# Altium PCB Copy of 软排转接.PcbDoc
Units mm, origin at the board's own origin, x right, y up, seen from the top; angles counter-clockwise.
Board outline 32 x 73.79 mm, 2 copper layers (Top Layer, Bottom Layer); 11 components, 73 nets, 188 pads, 1 vias.
Unrouted connection lines stored in the file: 57.
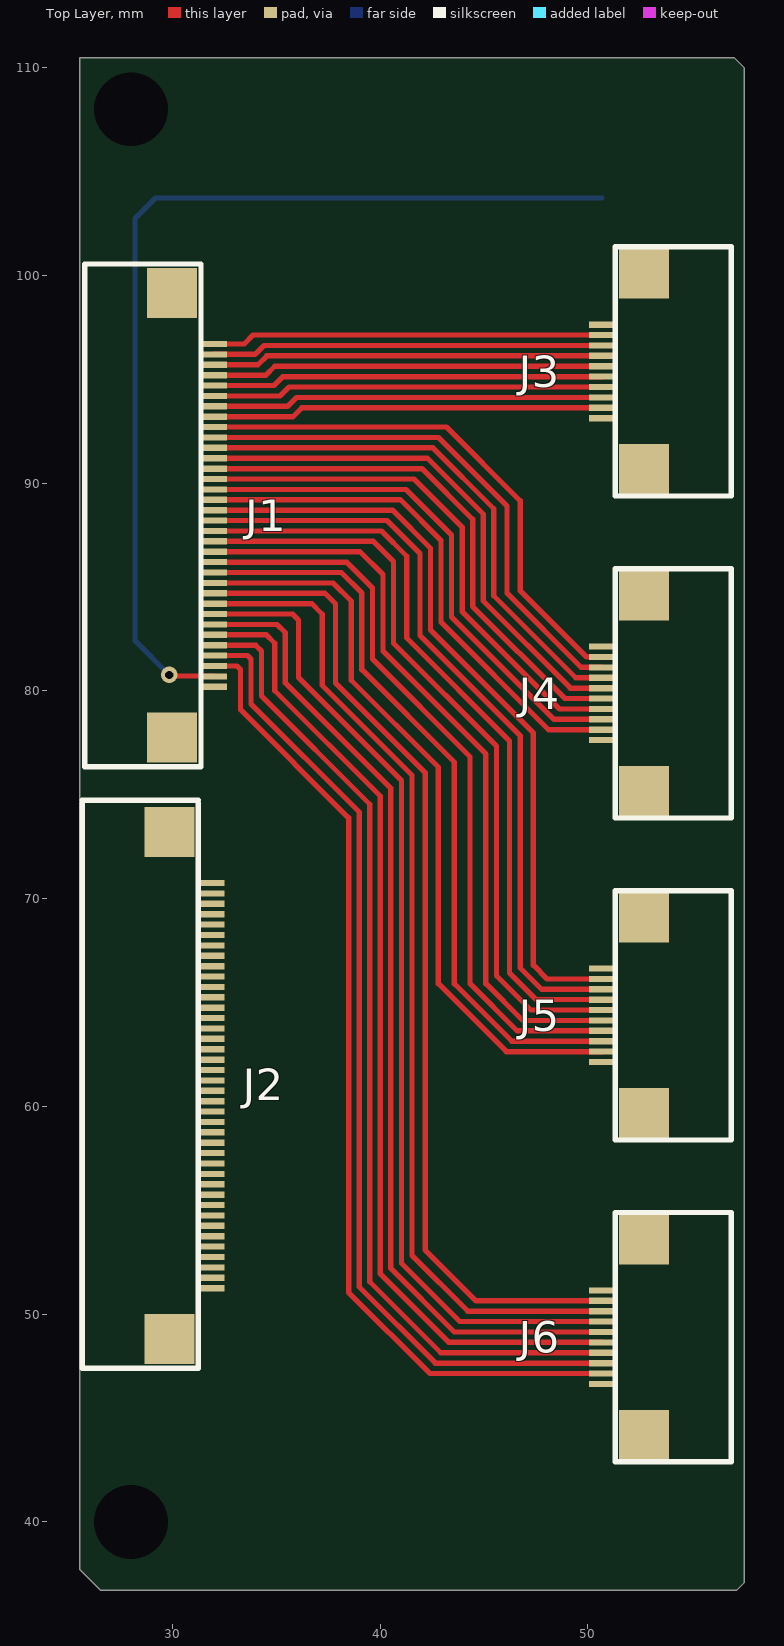
[diagram p0: Top Layer view]
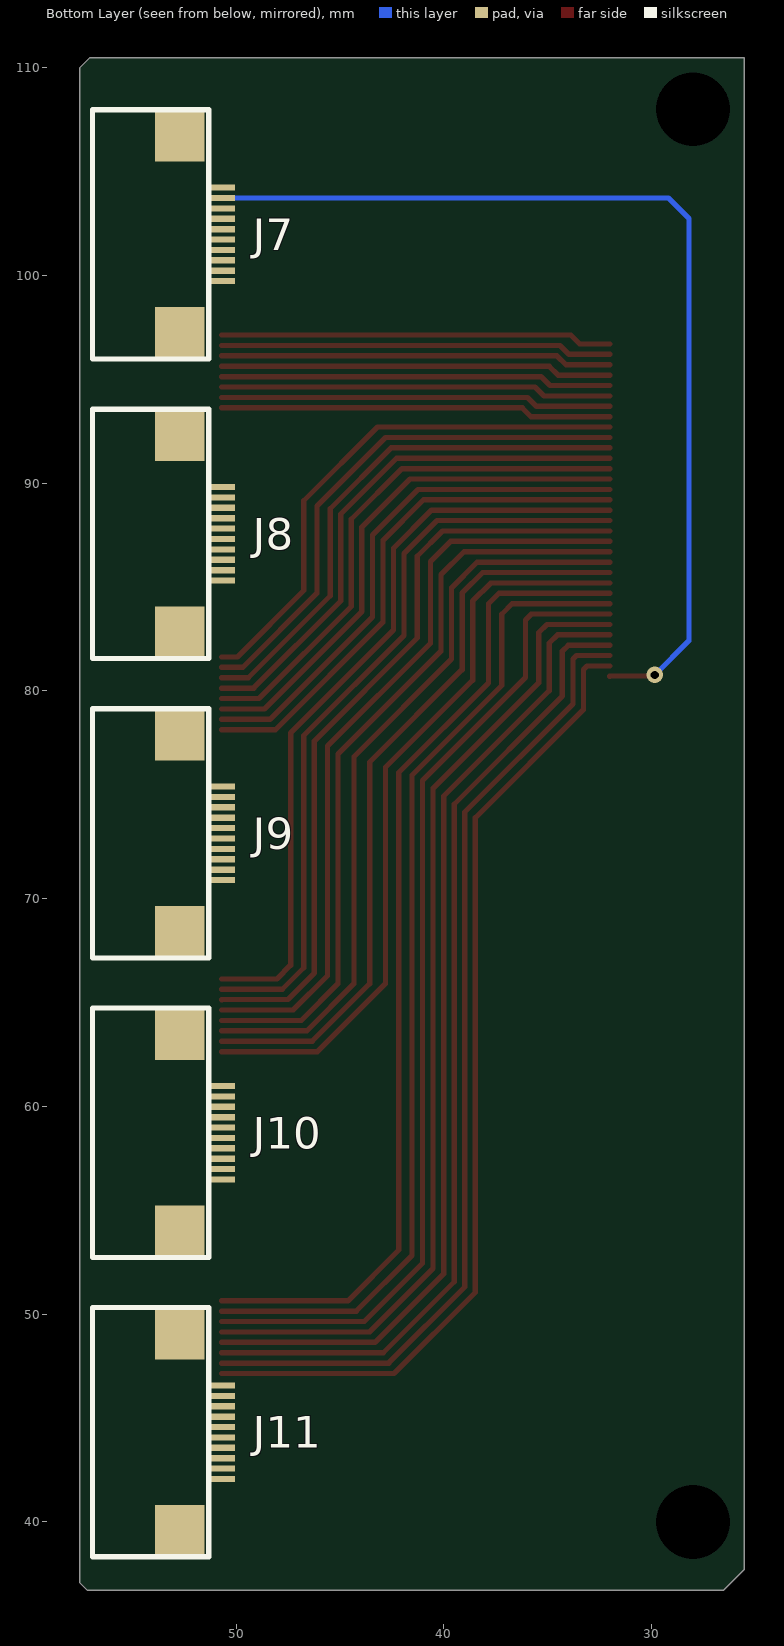
[diagram p1: Bottom Layer view, seen from below]

## Layer stack, top to bottom
Top Solder: solder mask 0.0102, Solder Resist, Dk 3.5
Top Layer: signal copper 0.0356
Dielectric 1: dielectric 0.32, FR-4, Dk 4.8
Bottom Layer: signal copper 0.0356
Bottom Solder: solder mask 0.0102, Solder Resist, Dk 3.5

## Board outline
26.543,36.703 25.527,37.719 25.527,110.49 57.023,110.49 57.531,109.982 57.531,37.084 57.15,36.703

## Design rules (kind name [scope] priority, off if disabled: settings)
Clearance [All] p1: gap=0.2 ignorepadtopadclearanceinfootprint=FALSE
PolygonConnect [All] p1: connectstyle=Relief reliefconductorwidth=0.254 reliefentries=4 polygonreliefangle="90 Angle" airgapwidth=0.254
RoutingVias [All] p1: holewidth=0.4 width=0.8 viastyle="Through Hole" minholewidth=0.4 minwidth=0.8 maxholewidth=0.4 maxwidth=0.8
SolderMaskExpansion [All] p1: expansion=0.102
Width [All] p1: maxlimit=0.254 minlimit=0.254 preferedwidth=0.254
30 further rules are at their usual default settings.

## Classes and differential pairs
net class routine: NetJ1_1 NetJ1_2 NetJ1_3 NetJ1_4 NetJ1_5 NetJ1_6 NetJ1_7 NetJ1_8 NetJ1_9 NetJ1_10 NetJ1_11 NetJ1_12 NetJ1_13 NetJ1_14 NetJ1_15 NetJ1_16 NetJ1_17 NetJ1_18 NetJ1_19 NetJ1_20 NetJ1_21 NetJ1_22 NetJ1_23 NetJ1_24 NetJ1_25 NetJ1_26 NetJ1_27 NetJ1_28 NetJ1_29 NetJ1_30 NetJ1_31 NetJ1_32 NetJ1_33 NetJ2_1 NetJ2_2 NetJ2_3 NetJ2_4 NetJ2_5 NetJ2_6 NetJ2_7 NetJ2_8 NetJ2_9 NetJ2_10 NetJ2_11 NetJ2_12 NetJ2_13 NetJ2_14 NetJ2_15 NetJ2_16 NetJ2_17 NetJ2_18 NetJ2_19 NetJ2_20 NetJ2_21 NetJ2_22 NetJ2_23 NetJ2_24 NetJ2_25 NetJ2_26 NetJ2_27 NetJ2_28 NetJ2_29 NetJ2_30 NetJ2_31 NetJ2_32 NetJ2_33 NetJ2_34 NetJ2_35 NetJ2_36 NetJ2_37 NetJ2_38 NetJ2_39

## Components (designator, comment, footprint, x,y, rotation, side; value= is the part's Value field where it differs from the comment)
J1 "软排座" 34P软排线 32.004,88.452 r270 top
J2 "软排座" 40P软排线 31.877,61.004 r270 top
J3 "软排座" 10P软排线(逆) 50.68,95.381 r90 top
J4 "软排座" 10P软排线(逆) 50.68,79.885 r90 top
J5 "软排座" 10P软排线(逆) 50.68,64.39 r90 top
J6 "软排座" 10P软排线(逆) 50.68,48.894 r90 top
J7 "软排座" 10P软排线 50.68,101.98 r270 bottom
J8 "软排座" 10P软排线 50.68,87.565 r270 bottom
J9 "软排座" 10P软排线 50.68,73.149 r270 bottom
J10 "软排座" 10P软排线 50.68,58.734 r270 bottom
J11 "软排座" 10P软排线 50.68,44.319 r270 bottom

## Footprints (in the part's own frame and the unit in brackets; to place one, negate y for a bottom-side part, rotate by r counter-clockwise, add the part's x,y. Pads: shape width x height; smd on the part's side, far side on the other; paste and mask are expansions set on the pad)
10P软排线 [mm] "10P"
  rect 0.3x1.25 smd: 1(-2.25,0) 2(-1.75,0) 3(-1.25,0) 4(-0.75,0) 5(-0.25,0) 6(0.25,0) 7(0.75,0) 8(1.25,0) 9(1.75,0) 10(2.25,0)
  rect 2.4x2.4 smd: ""(-4.7,-2.025) ""(4.7,-2.025)
  silkscreen extent -6,-6.22 6,-0.64
10P软排线(逆) [mm] "10P"
  rect 0.3x1.25 smd: 1(2.25,0) 2(1.75,0) 3(1.25,0) 4(0.75,0) 5(0.25,0) 6(-0.25,0) 7(-0.75,0) 8(-1.25,0) 9(-1.75,0) 10(-2.25,0)
  rect 2.4x2.4 smd: ""(-4.7,-2.025) ""(4.7,-2.025)
  silkscreen extent -6,-6.22 6,-0.64
34P软排线 [mm] "34P"
  rect 0.3x1.25 smd: 1(-8.25,0) 2(-7.75,0) 3(-7.25,0) 4(-6.75,0) 5(-6.25,0) 6(-5.75,0) 7(-5.25,0) 8(-4.75,0) 9(-4.25,0) 10(-3.75,0) 11(-3.25,0) 12(-2.75,0) 13(-2.25,0) 14(-1.75,0) 15(-1.25,0) 16(-0.75,0) 17(-0.25,0) 18(0.25,0) 19(0.75,0) 20(1.25,0) 21(1.75,0) 22(2.25,0) 23(2.75,0) 24(3.25,0) 25(3.75,0) 26(4.25,0) 27(4.75,0) 28(5.25,0) 29(5.75,0) 30(6.25,0) 31(6.75,0) 32(7.25,0) 33(7.75,0) 34(8.25,0)
  rect 2.4x2.4 smd: ""(-10.7,-2.025) ""(10.7,-2.025)
  silkscreen extent -12.1,-6.22 12.1,-0.63
40P软排线 [mm] "40P"
  rect 0.3x1.25 smd: 1(-9.75,0) 2(-9.25,0) 3(-8.75,0) 4(-8.25,0) 5(-7.75,0) 6(-7.25,0) 7(-6.75,0) 8(-6.25,0) 9(-5.75,0) 10(-5.25,0) 11(-4.75,0) 12(-4.25,0) 13(-3.75,0) 14(-3.25,0) 15(-2.75,0) 16(-2.25,0) 17(-1.75,0) 18(-1.25,0) 19(-0.75,0) 20(-0.25,0) 21(0.25,0) 22(0.75,0) 23(1.25,0) 24(1.75,0) 25(2.25,0) 26(2.75,0) 27(3.25,0) 28(3.75,0) 29(4.25,0) 30(4.75,0) 31(5.25,0) 32(5.75,0) 33(6.25,0) 34(6.75,0) 35(7.25,0) 36(7.75,0) 37(8.25,0) 38(8.75,0) 39(9.25,0) 40(9.75,0)
  rect 2.4x2.4 smd: ""(-12.2,-2.025) ""(12.2,-2.025)
  silkscreen extent -13.73,-6.22 13.61,-0.63

## Part data
J1: library part 34P
J2: library part 40P
J3 J4 J5 J6 J7 J8 J9 J10 J11: library part 10P

## Free pads (board coordinates)
  rect 1.2x0.8 hole 3.556: ""(28,40) ""(28,108)

## Via types
v1: diameter 0.8, hole 0.4, Top Layer to Bottom Layer, tented both sides, 1 vias

## Nets (pads, with @x,y where several pads share a name; then routed paths per layer and width w, separated by ;. In a path a pad name is that pad's centre, name@x,y a point inside that pad or via, vN(x,y) a via of type N, cw(c..) or ccw(c..) an arc to the next point about the centre after c; other vN are vias at no path point)
GND: J2.40 J3.1 J3.10 J4.1 J4.10 J5.1 J5.10 J6.1 J6.10 J7.1 J7.10 J8.1 J8.10 J9.1 J9.10 J10.1 J10.10 J11.1 J11.10
NetJ1_1: J1.1 J3.2 | length 18.9
  Top Layer w0.254: J1.1 33.456,96.702 33.885,97.131 J3.2
NetJ1_2: J1.2 J3.3 | length 18.9
  Top Layer w0.254: J1.2 33.972,96.202 34.401,96.631 J3.3
NetJ1_3: J1.3 J3.4 | length 18.9
  Top Layer w0.254: J1.3 34.115,95.702 34.544,96.131 J3.4
NetJ1_4: J1.4 J3.5 | length 18.9
  Top Layer w0.254: J1.4 34.496,95.202 34.925,95.631 J3.5
NetJ1_5: J1.5 J3.6 | length 18.9
  Top Layer w0.254: J1.5 34.885,94.702 35.314,95.131 J3.6
NetJ1_6: J1.6 J3.7 | length 18.9
  Top Layer w0.254: J1.6 35.179,94.202 35.608,94.631 J3.7
NetJ1_7: J1.7 J3.8 | length 18.9
  Top Layer w0.254: J1.7 35.536,93.702 35.965,94.131 J3.8
NetJ1_8: J1.8 J3.9 | length 18.9
  Top Layer w0.254: J1.8 35.798,93.202 36.227,93.631 J3.9
NetJ1_9: J1.9 J4.2 | length 25.8
  Top Layer w0.254: J1.9 43.188,92.702 46.736,89.154 46.736,84.836 49.937,81.635 J4.2
NetJ1_10: J1.10 J4.3 | length 25.7
  Top Layer w0.254: J1.10 42.799,92.202 46.101,88.9 46.101,84.709 49.675,81.135 J4.3
NetJ1_11: J1.11 J4.4 | length 25.7
  Top Layer w0.254: J1.11 42.537,91.702 45.466,88.773 45.466,84.582 49.413,80.635 J4.4
NetJ1_12: J1.12 J4.5 | length 25.7
  Top Layer w0.254: J1.12 42.275,91.202 44.958,88.519 44.958,84.328 49.151,80.135 J4.5
NetJ1_13: J1.13 J4.6 | length 25.7
  Top Layer w0.254: J1.13 42.013,90.702 44.45,88.265 44.45,84.074 48.889,79.635 J4.6
NetJ1_14: J1.14 J4.7 | length 25.6
  Top Layer w0.254: J1.14 41.624,90.202 43.942,87.884 43.942,83.82 48.627,79.135 J4.7
NetJ1_15: J1.15 J4.8 | length 25.6
  Top Layer w0.254: J1.15 41.235,89.702 43.434,87.503 43.434,83.566 48.365,78.635 J4.8
NetJ1_16: J1.16 J4.9 | length 25.6
  Top Layer w0.254: J1.16 40.973,89.202 42.926,87.249 42.926,83.312 48.103,78.135 J4.9
NetJ1_17: J1.17 J5.2 | length 36.9
  Top Layer w0.254: J1.17 40.584,88.702 42.418,86.868 42.418,82.931 47.371,77.978 47.371,66.802 48.033,66.14 J5.2
NetJ1_18: J1.18 J5.3 | length 36.9
  Top Layer w0.254: J1.18 40.322,88.202 41.91,86.614 41.91,82.677 46.736,77.851 46.736,66.675 47.771,65.64 J5.3
NetJ1_19: J1.19 J5.4 | length 36.9
  Top Layer w0.254: J1.19 40.06,87.702 41.275,86.487 41.275,82.55 46.228,77.597 46.228,66.421 47.498,65.151 50.669,65.151 J5.4
NetJ1_20: J1.20 J5.5 | length 36.8
  Top Layer w0.254: J1.20 39.671,87.202 40.64,86.233 40.64,82.296 45.593,77.343 45.593,66.294 47.247,64.64 J5.5
NetJ1_21: J1.21 J5.6 | length 36.7
  Top Layer w0.254: J1.21 39.028,86.702 40.132,85.598 40.132,81.915 45.085,76.962 45.085,65.913 46.858,64.14 J5.6
NetJ1_22: J1.22 J5.7 | length 36.4
  Top Layer w0.254: J1.22 38.385,86.202 39.624,84.963 39.624,81.534 44.323,76.835 44.323,65.913 46.596,63.64 J5.7
NetJ1_23: J1.23 J5.8 | length 36.4
  Top Layer w0.254: J1.23 38.123,85.702 39.116,84.709 39.116,81.026 43.561,76.581 43.561,65.913 46.334,63.14 J5.8
NetJ1_24: J1.24 J5.9 | length 36.4
  Top Layer w0.254: J1.24 37.734,85.202 38.608,84.328 38.608,80.518 42.799,76.327 42.799,65.913 46.072,62.64 J5.9
NetJ1_25: J1.25 J6.2 | length 48.5
  Top Layer w0.254: J1.25 37.345,84.702 37.846,84.201 37.846,80.391 42.164,76.073 42.164,53.086 44.606,50.644 J6.2
NetJ1_26: J1.26 J6.3 | length 48.3
  Top Layer w0.254: J1.26 36.702,84.202 37.211,83.693 37.211,80.264 41.529,75.946 41.529,52.832 44.217,50.144 J6.3
NetJ1_27: J1.27 J6.4 | length 48
  Top Layer w0.254: J1.27 35.783,83.702 36.068,83.417 36.068,80.645 41.021,75.692 41.021,52.451 43.828,49.644 J6.4
NetJ1_28: J1.28 J6.5 | length 47.7
  Top Layer w0.254: J1.28 35.035,83.202 35.433,82.804 35.433,80.391 40.513,75.311 40.513,52.197 43.566,49.144 J6.5
NetJ1_29: J1.29 J6.6 | length 47.6
  Top Layer w0.254: J1.29 34.519,82.702 34.925,82.296 34.925,80.01 40.005,74.93 40.005,51.943 43.304,48.644 J6.6
NetJ1_30: J1.30 J6.7 | length 47.5
  Top Layer w0.254: J1.30 34.003,82.202 34.29,81.915 34.29,79.756 39.497,74.549 39.497,51.562 42.915,48.144 J6.7
NetJ1_31: J1.31 J6.8 | length 47.4
  Top Layer w0.254: J1.31 33.614,81.702 33.782,81.534 33.782,79.375 38.989,74.168 38.989,51.308 42.653,47.644 J6.8
NetJ1_32: J1.32 J6.9 | length 47.3
  Top Layer w0.254: J1.32 33.098,81.202 33.274,81.026 33.274,79.099 38.481,73.892 38.481,51.054 42.391,47.144 J6.9
NetJ1_33: J1.33 J7.2 | length 47.7
  Top Layer w0.254: v1(29.845,80.772) 29.892,80.725 31.981,80.725 J1.33
  Bottom Layer w0.254: v1(29.845,80.772) 28.194,82.423 28.194,102.743 29.181,103.73 J7.2
NetJ2_1: J2.1 J7.3
NetJ2_2: J2.2 J7.4
NetJ2_3: J2.3 J7.5
NetJ2_4: J2.4 J7.6
NetJ2_5: J2.5 J7.7
NetJ2_6: J2.6 J7.8
NetJ2_7: J2.7 J7.9
NetJ2_8: J2.8 J8.2
NetJ2_9: J2.9 J8.3
NetJ2_10: J2.10 J8.4
NetJ2_11: J2.11 J8.5
NetJ2_12: J2.12 J8.6
NetJ2_13: J2.13 J8.7
NetJ2_14: J2.14 J8.8
NetJ2_15: J2.15 J8.9
NetJ2_16: J2.16 J9.2
NetJ2_17: J2.17 J9.3
NetJ2_18: J2.18 J9.4
NetJ2_19: J2.19 J9.5
NetJ2_20: J2.20 J9.6
NetJ2_21: J2.21 J9.7
NetJ2_22: J2.22 J9.8
NetJ2_23: J2.23 J9.9
NetJ2_24: J2.24 J10.2
NetJ2_25: J2.25 J10.3
NetJ2_26: J2.26 J10.4
NetJ2_27: J2.27 J10.5
NetJ2_28: J2.28 J10.6
NetJ2_29: J2.29 J10.7
NetJ2_30: J2.30 J10.8
NetJ2_31: J2.31 J10.9
NetJ2_32: J2.32 J11.2
NetJ2_33: J2.33 J11.3
NetJ2_34: J2.34 J11.4
NetJ2_35: J2.35 J11.5
NetJ2_36: J2.36 J11.6
NetJ2_37: J2.37 J11.7
NetJ2_38: J2.38 J11.8
NetJ2_39: J2.39 J11.9
pads on no net: J1. J1.34 J2. J3. J4. J5. J6. J7. J8. J9. J10. J11.